# Altium PCB BRAKE PCB PROFILE (Left).PcbDoc
Units mm, origin at the board's own origin, x right, y up, seen from the top; angles counter-clockwise.
Board outline 198.6 x 90.6 mm, 2 copper layers (Top Layer, Bottom Layer); 79 components, 80 nets, 288 pads, 28 vias.
Unrouted connection lines stored in the file: 1.
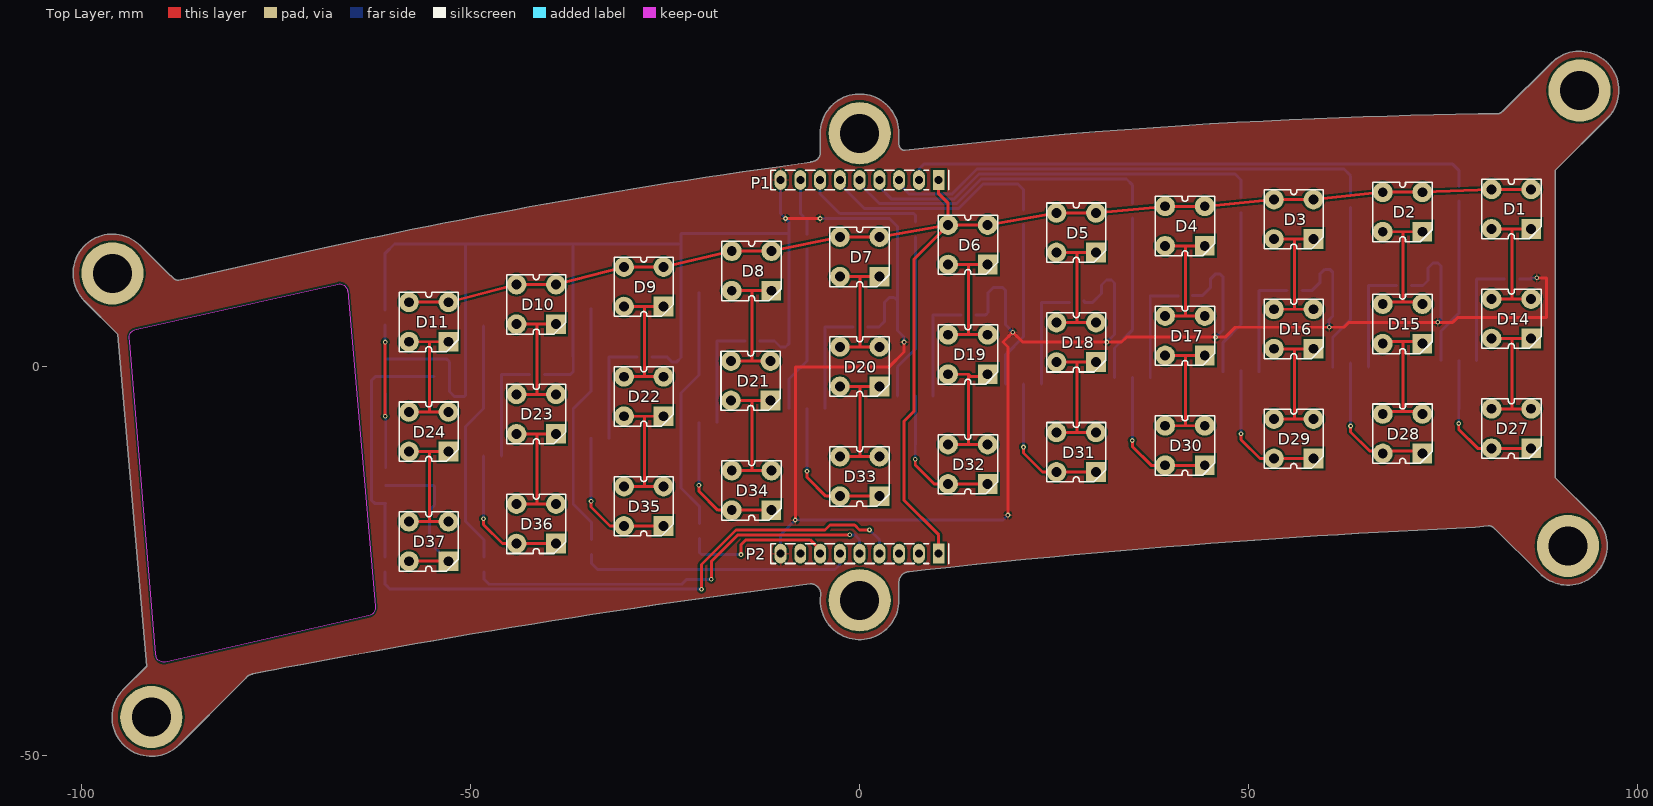
[diagram p0: Top Layer view]
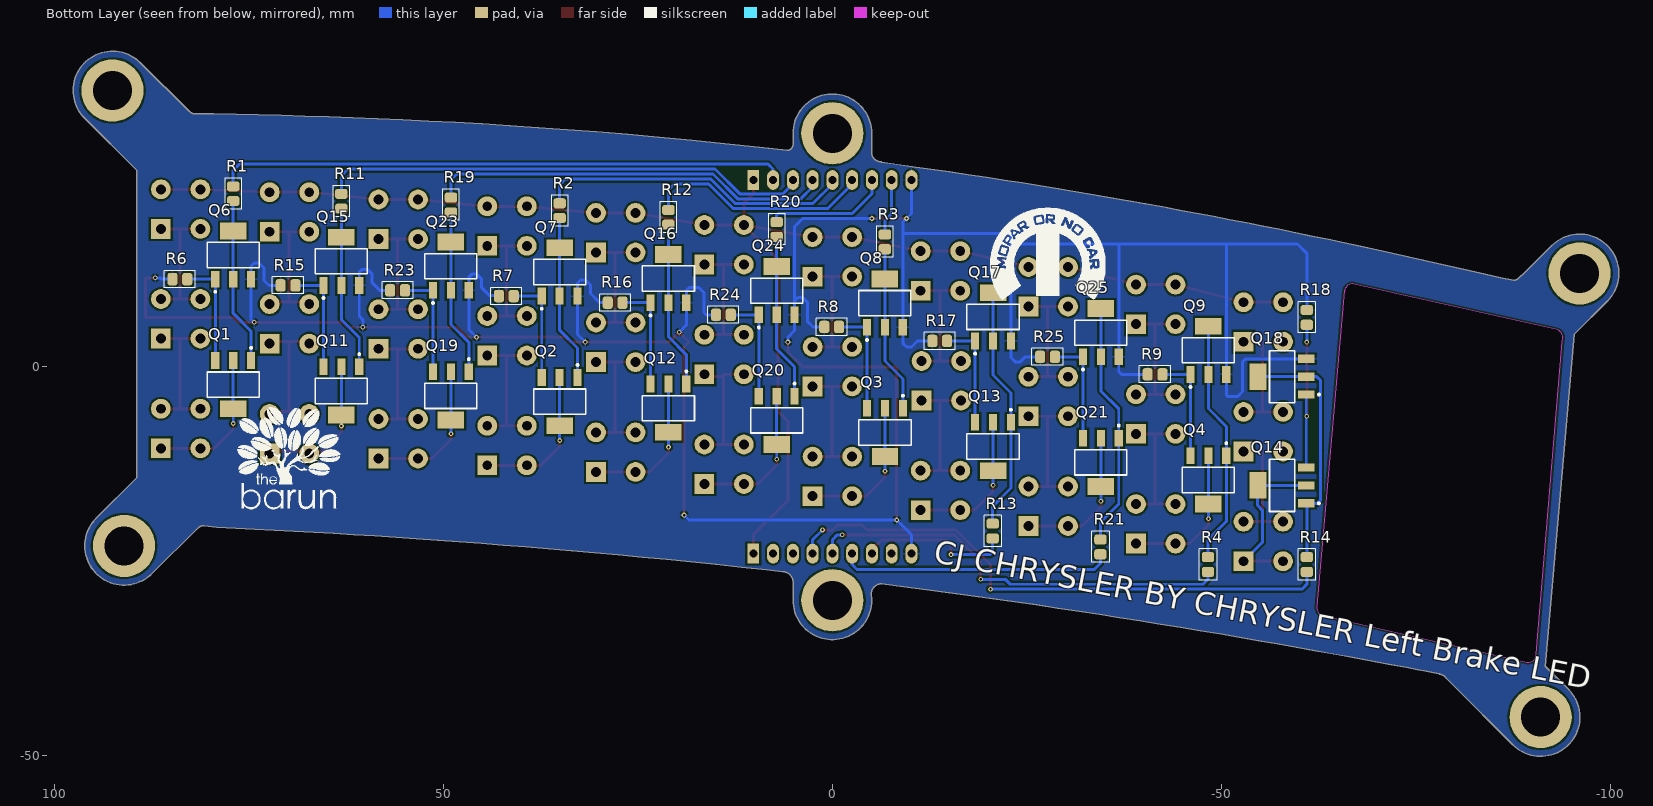
[diagram p1: Bottom Layer view, seen from below]
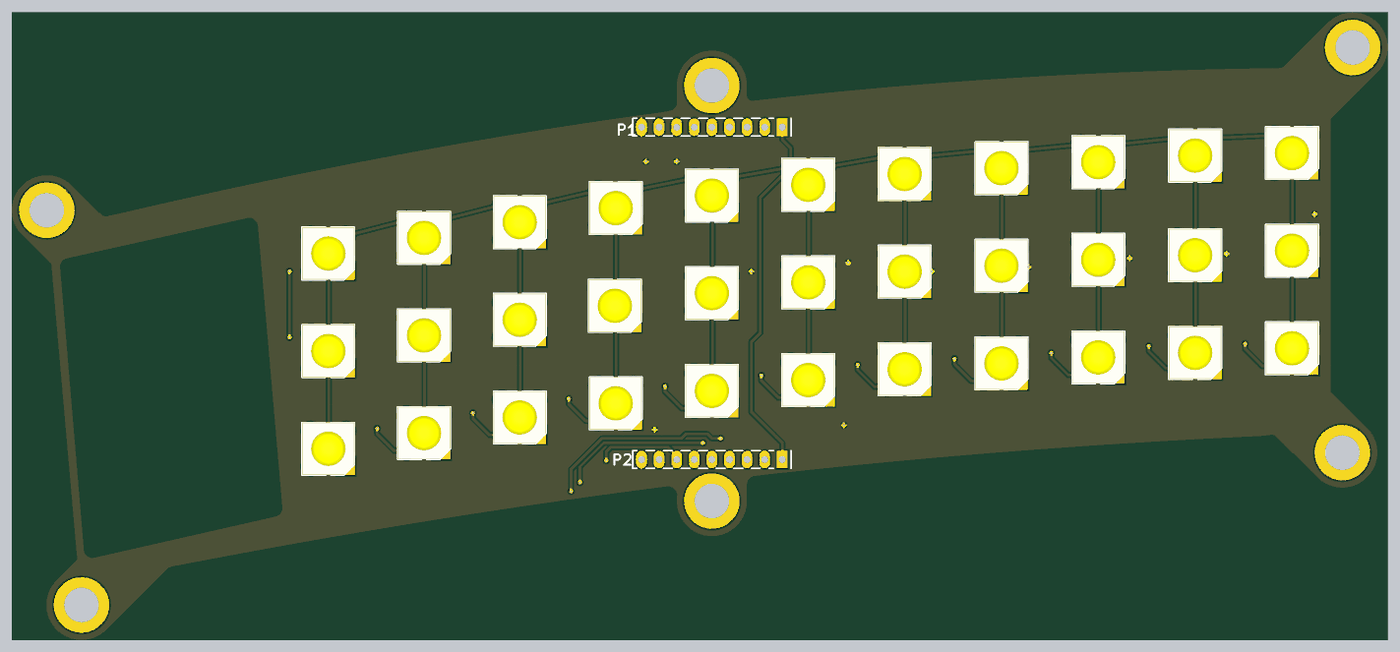
[diagram p2: 3D render of the assembled board from above, using the file's embedded part models]
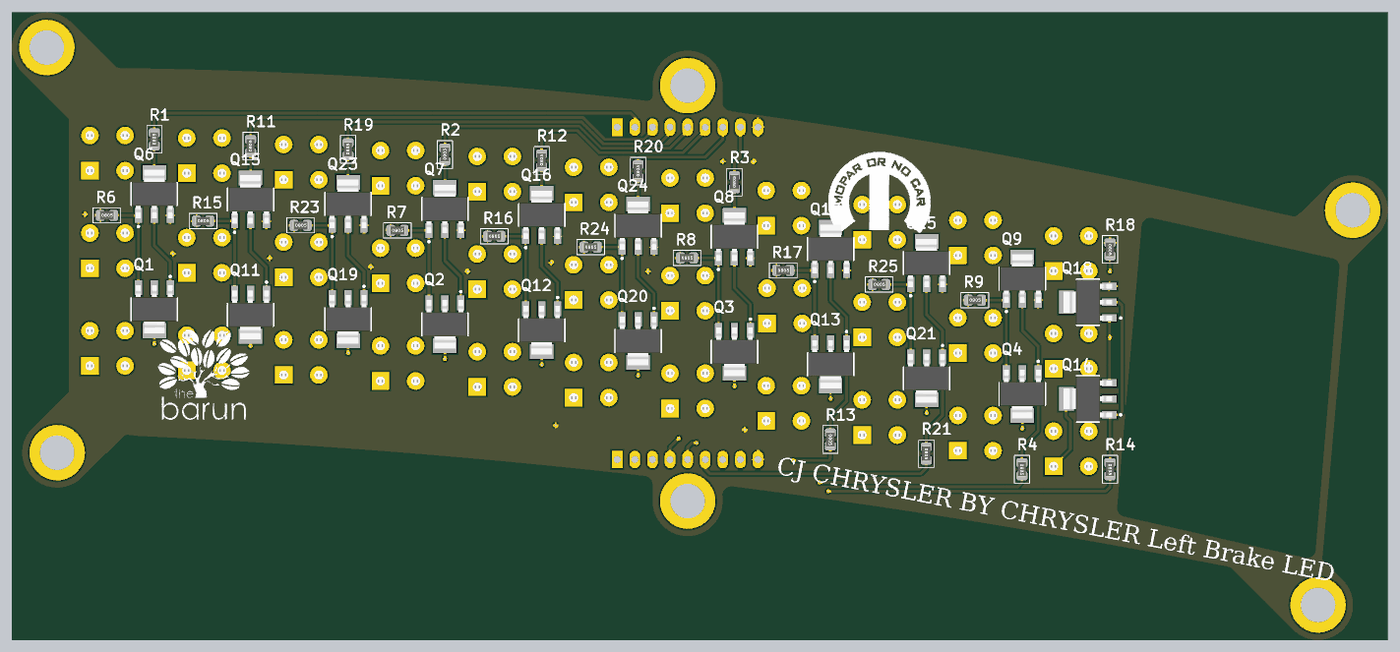
[diagram p3: 3D render of the assembled board from below, using the file's embedded part models]

## Layer stack, top to bottom
Top Solder: solder mask 0.0102, Solder Resist, Dk 3.5
Top Layer: signal copper 0.0356
Dielectric 1: dielectric 0.32, FR-4, Dk 4.8
Bottom Layer: signal copper 0.0356
Bottom Solder: solder mask 0.0102, Solder Resist, Dk 3.5

## Board outline
421 vertices, not listed, extent -101.049,-50.049 97.55,40.549
cut-out: -93.795,3.307 -93.823,3.646 cw(c-92.837,3.81) -92.961,4.802 -92.601,4.907 -67.045,10.622 cw(c-66.802,9.652) -65.81,9.776 -65.786,9.778 -62.265,-30.792 cw(c-63.246,-30.988) -62.895,-31.924 -63.388,-32.065 -89.229,-37.941 cw(c-89.408,-36.957) -90.408,-36.957

## Design rules (kind name [scope] priority, off if disabled: settings)
Clearance [All] p1: gap=0.254
PolygonConnect [All] p1: connectstyle=Relief reliefconductorwidth=0.254 reliefentries=4 polygonreliefangle="90 Angle" airgapwidth=0.254
RoomDefinition Indicator [InComponentClass('Indicator')] p1: confinementstyle=ConfineIn formatcopy=TRUE lockcomponents=FALSE outline -100,-50 100,-50 100,40 -100,40
RoutingVias [All] p1: holewidth=0.711 width=1.27 viastyle="Through Hole" minholewidth=0.305 minwidth=0.61 maxholewidth=0.711 maxwidth=1.27
SolderMaskExpansion [All] p1: expansion=0.102
Width [All] p1: maxlimit=2.54 minlimit=0.254 preferedwidth=0.254
30 further rules are at their usual default settings.

## Components (designator, comment, footprint, x,y, rotation, side; value= is the part's Value field where it differs from the comment)
D1 "AMBER" "CREE P4 YELLOW"#1 83.743,20.262 r180 top
D2 "AMBER" "CREE P4 YELLOW"#1 69.758,19.893 r180 top
D3 "AMBER" "CREE P4 YELLOW"#1 55.774,18.951 r180 top
D4 "AMBER" "CREE P4 YELLOW"#1 41.8,18.083 r180 top
D5 "AMBER" "CREE P4 YELLOW"#1 27.826,17.235 r180 top
D6 "AMBER" "CREE P4 YELLOW"#1 13.913,15.677 r180 top
D7 "AMBER" "CREE P4 YELLOW"#1 0,14.119 r180 top
D8 "AMBER" "CREE P4 YELLOW"#1 -13.884,12.318 r180 top
D9 "AMBER" "CREE P4 YELLOW"#1 -27.734,10.28 r180 top
D10 "AMBER" "CREE P4 YELLOW"#1 -41.551,8.019 r180 top
D11 "AMBER" "CREE P4 YELLOW"#1 -55.367,5.759 r180 top
D14 "AMBER" "CREE P4 YELLOW"#1 83.743,6.168 r180 top
D15 "AMBER" "CREE P4 YELLOW"#1 69.758,5.512 r180 top
D16 "AMBER" "CREE P4 YELLOW"#1 55.774,4.857 r180 top
D17 "AMBER" "CREE P4 YELLOW"#1 41.8,3.989 r180 top
D18 "AMBER" "CREE P4 YELLOW"#1 27.826,3.141 r180 top
D19 "AMBER" "CREE P4 YELLOW"#1 13.913,1.583 r180 top
D20 "AMBER" "CREE P4 YELLOW"#1 0,0.025 r180 top
D21 "AMBER" "CREE P4 YELLOW"#1 -14,-1.794 r180 top
D22 "AMBER" "CREE P4 YELLOW"#1 -27.734,-3.814 r180 top
D23 "AMBER" "CREE P4 YELLOW"#1 -41.551,-6.075 r180 top
D24 "AMBER" "CREE P4 YELLOW"#1 -55.367,-8.336 r180 top
D27 "AMBER" "CREE P4 YELLOW"#1 83.743,-7.936 r180 top
D28 "AMBER" "CREE P4 YELLOW"#1 69.758,-8.591 r180 top
D29 "AMBER" "CREE P4 YELLOW"#1 55.774,-9.247 r180 top
D30 "AMBER" "CREE P4 YELLOW"#1 41.8,-10.114 r180 top
D31 "AMBER" "CREE P4 YELLOW"#1 27.826,-10.963 r180 top
D32 "AMBER" "CREE P4 YELLOW"#1 13.913,-12.521 r180 top
D33 "AMBER" "CREE P4 YELLOW"#1 0,-14.078 r180 top
D34 "AMBER" "CREE P4 YELLOW"#1 -13.884,-15.88 r180 top
D35 "AMBER" "CREE P4 YELLOW"#2 -27.734,-20.458 r180 top
D36 "AMBER" "CREE P4 YELLOW"#1 -41.551,-20.178 r180 top
D37 "AMBER" "CREE P4 YELLOW"#1 -55.367,-22.439 r180 top
P1 "Header 9" "HEADER 1x9" 0,24 r180 top
P2 "Header 9" "HEADER 1x9" 0,-24 r180 top
Q1 "BCP56" SOT223 76.984,-2.296 r0 bottom
Q2 "BCP56" SOT223 35.042,-4.474 r0 bottom
Q3 "BCP56" SOT223 -6.759,-8.438 r0 bottom
Q4 "BCP56" SOT223 -48.31,-14.538 r0 bottom
Q6 "BCP56" SOT223 76.984,14.363 r180 bottom
Q7 "BCP56" SOT223 35.041,12.185 r180 bottom
Q8 "BCP56" SOT223 -6.745,8.18 r180 bottom
Q9 "BCP56" SOT223 -48.31,2.12 r180 bottom
Q11 "BCP56" SOT223 63.091,-3.1 r0 bottom
Q12 "BCP56" SOT223 21.067,-5.323 r0 bottom
Q13 "BCP56" SOT223 -20.642,-10.24 r0 bottom
Q14 "BCP56" SOT223 -57.785,-15.24 r90 bottom
Q15 "BCP56" SOT223 63.091,13.559 r180 bottom
Q16 "BCP56" SOT223 21.067,11.336 r180 bottom
Q17 "BCP56" SOT223 -20.643,6.419 r180 bottom
Q18 "BCP56" SOT223 -57.785,-1.27 r90 bottom
Q19 "BCP56" SOT223 49.015,-3.735 r0 bottom
Q20 "BCP56" SOT223 7.154,-6.881 r0 bottom
Q21 "BCP56" SOT223 -34.493,-12.278 r0 bottom
Q23 "BCP56" SOT223 49.015,12.924 r180 bottom
Q24 "BCP56" SOT223 7.154,9.778 r180 bottom
Q25 "BCP56" SOT223 -34.493,4.381 r180 bottom
R1 "1k" "RESISTOR 0805" 76.984,22.237 r90 bottom
R2 "1k" "RESISTOR 0805" 35.041,20.059 r90 bottom
R3 "1k" "RESISTOR 0805" -6.745,16.054 r90 bottom
R4 "1k" "RESISTOR 0805" -48.26,-25.4 r270 bottom
R6 "8R2" "RESISTOR 0805" 83.834,11.263 r180 bottom
R7 "8R2" "RESISTOR 0805" 41.892,9.085 r180 bottom
R8 "8R2" "RESISTOR 0805" 0.091,5.121 r180 bottom
R9 "8R2" "RESISTOR 0805" -41.459,-0.98 r180 bottom
R11 "1k" "RESISTOR 0805" 63.091,21.27 r90 bottom
R12 "1k" "RESISTOR 0805" 21.067,19.21 r90 bottom
R13 "1k" "RESISTOR 0805" -20.593,-21.102 r270 bottom
R14 "1k" "RESISTOR 0805" -60.96,-25.4 r270 bottom
R15 "8R2" "RESISTOR 0805" 69.941,10.459 r180 bottom
R16 "8R2" "RESISTOR 0805" 27.918,8.236 r180 bottom
R17 "8R2" "RESISTOR 0805" -13.792,3.319 r180 bottom
R18 "8R2" "RESISTOR 0805" -60.96,6.35 r270 bottom
R19 "1k" "RESISTOR 0805" 49.015,20.798 r90 bottom
R20 "1k" "RESISTOR 0805" 7.154,17.652 r90 bottom
R21 "1k" "RESISTOR 0805" -34.444,-23.139 r270 bottom
R23 "8R2" "RESISTOR 0805" 55.865,9.824 r180 bottom
R24 "8R2" "RESISTOR 0805" 14.005,6.678 r180 bottom
R25 "8R2" "RESISTOR 0805" -27.643,1.281 r180 bottom

## Footprints (in the part's own frame and the unit in brackets; to place one, negate y for a bottom-side part, rotate by r counter-clockwise, add the part's x,y. Pads: shape width x height; smd on the part's side, far side on the other; paste and mask are expansions set on the pad)
"CREE P4 YELLOW"#1 [mm] "CREE P4 YELLOW"
  rect 2.54x2.54 hole 1.27: 1(-2.54,2.54)
  round 2.54 hole 1.27: 2(-2.54,-2.54) 3(2.54,-2.54) 4(2.54,2.54)
  silkscreen extent -3.81,-3.81 3.81,3.81, body extent -3.81,-3.81 3.81,3.81, height 6.91
"CREE P4 YELLOW"#2 [mm] "CREE P4 YELLOW"
  rect 2.54x2.54 hole 1.27: 1(-2.54,0)
  round 2.54 hole 1.27: 2(-2.54,-5.08) 3(2.54,-5.08) 4(2.54,0)
  silkscreen extent -3.81,-6.35 3.81,1.27, body extent -3.81,-6.35 3.81,1.27, height 6.91
"HEADER 1x9" [mil]
  rect 60x100 hole 40: 1(-400,0)
  oval 60x100 hole 40: 2(-300,0) 3(-200,0) 4(-100,0) 5(0,0) 6(100,0) 7(200,0) 8(300,0) 9(400,0)
  silkscreen extent -450,-50 450,50
"RESISTOR 0805" [mm]
  rrect50% 1.3x1.6 smd: 1(-0.95,0) 2(0.95,0)
  silkscreen extent -2,-1.1 2,1.1, body extent -1.25,-0.62 1.25,0.62, height 0.8
SOT223 [mm] "SOT-223/SC-73; 4 Leads; Body 6.7 x 7.3 mm, inc. leads (LxW max)"
  rect 1.05x2.15 smd: 1(-2.3,-3.1) 2(0,-3.1) 3(2.3,-3.1)
  rect 3.4x2.15 smd: 2(0,3.1)
  silkscreen extent -3.35,-4.85 3.35,1.62, body extent -3.25,-3.5 3.25,3.5, height 1.67

## Part data
D1 D2 D3 D4 D5 D6 D7 D8 D9 D10 D11 D14 D15 D16 D17 D18 D19 D20 D21 D22 D23 D24 D27 D28 D29 D30 D31 D32 D33 D34 D35 D36 D37: library part CP41B-AFSCM0Q0264, "CREE AMBER LED P4 (SUPERFLUX)"
P1 P2: "Header, 9-Pin"
Q1 Q2 Q3 Q4 Q6 Q7 Q8 Q9 Q11 Q12 Q13 Q14 Q15 Q16 Q17 Q18 Q19 Q20 Q21 Q23 Q24 Q25: library part NPN, "BCP56 80 V, 1 A NPN medium power transistors"
R1 R2 R3 R4 R6 R7 R8 R9 R11 R12 R13 R14 R15 R16 R17 R18 R19 R20 R21 R23 R24 R25: library part Res2, "Resistor"

## Free pads (board coordinates)
  round 8 hole 5 unplated: MOUNT(-96,12) MOUNT(-91,-45) MOUNT(0,-30) MOUNT(0,30) MOUNT(91.008,-23.011) MOUNT(92.5,35.5)

## Via types
v1: diameter 0.61, hole 0.305, Top Layer to Bottom Layer, 28 vias

## Nets (pads, with @x,y where several pads share a name; then routed paths per layer and width w, separated by ;. In a path a pad name is that pad's centre, name@x,y a point inside that pad or via, vN(x,y) a via of type N, cw(c..) or ccw(c..) an arc to the next point about the centre after c; other vN are vias at no path point)
DRIVE_0: P1.2 R1.2 | length 73.4
  Bottom Layer w0.381: P1.2 7.62,25.4 8.255,26.035 76.2,26.035 76.984,25.251 R1.2
DRIVE_1: P1.3 R11.2 | length 63
  Bottom Layer w0.381: P1.3 5.08,23.495 6.35,22.225 11.911,22.225 15.086,25.4 62.23,25.4 63.091,24.539 R11.2
DRIVE_2: P1.4 R19.2 | length 51.9
  Bottom Layer w0.381: P1.4 2.54,23.113 4.063,21.59 12.174,21.59 15.349,24.765 48.26,24.765 49.015,24.01 R19.2
DRIVE_3: P1.5 R2.2 | length 40.6
  Bottom Layer w0.381: P1.5 0,23.495 2.54,20.955 12.437,20.955 15.612,24.13 34.29,24.13 35.041,23.379 R2.2
DRIVE_4: P1.6 R12.2 | length 29.6
  Bottom Layer w0.381: P1.6 -2.54,23.495 0.635,20.32 12.7,20.32 15.875,23.495 20.32,23.495 21.067,22.748 R12.2
DRIVE_5: P1.7 R20.2 | length 16
  Bottom Layer w0.381: P1.7 -5.08,22.225 -2.54,19.685 6.985,19.685 7.154,19.516 R20.2
DRIVE_6: P1.8 R3.2 | length 7.4
  Bottom Layer w0.381: P1.8 -7.62,19.685 -6.745,18.81 R3.2
DRIVE_7: P2.7 R13.2 | length 20
  Top Layer w0.381: v1(-15.24,-24.13) -15.24,-22.86 -14.605,-22.225 -6.35,-22.225 -5.08,-23.495 P2.7
  Bottom Layer w0.381: R13.2 -20.593,-23.857 -20.32,-24.13 v1(-15.24,-24.13)
DRIVE_8: P2.6 R21.2 | length 35.1
  Bottom Layer w0.381: R21.2 -34.444,-25.246 -33.655,-26.035 -3.175,-26.035 -2.54,-25.4 P2.6
DRIVE_9: P2.5 pad.MOUNT@0,-30 R4.2 | length 55.5
  Top Layer w0.381: v1(-19.05,-27.305) -19.05,-25.028 -15.612,-21.59 v1(-1.27,-21.59)
  Bottom Layer w0.381: R4.2 -48.26,-27.305 -47.625,-27.94 -22.86,-27.94 -22.225,-27.305 v1(-19.05,-27.305) ; v1(-1.27,-21.59) -0.635,-21.59 0,-22.225 P2.5
DRIVE_10: P2.4 R14.2 | length 73.2
  Top Layer w0.381: v1(-20.32,-28.575) -20.32,-25.4 -15.875,-20.955 -4.445,-20.955 -3.81,-20.32 -0.635,-20.32 0,-20.955 v1(1.27,-20.955)
  Bottom Layer w0.381: R14.2 -60.96,-27.94 -60.325,-28.575 v1(-20.32,-28.575) ; v1(1.27,-20.955) 2.54,-22.225 P2.4
DRIVE_11: P2.3
DRIVE_12: P2.2
GND: P1.9 P2.9 Q6.3 Q7.3 Q8.3 Q9.3 Q15.3 Q16.3 Q17.3 Q18.3 Q23.3 Q24.3 Q25.3 R6.1 R7.1 R8.1 R9.1 R15.1 R16.1 R17.1 R18.1 R23.1 R24.1 R25.1 | length 435.9
  Top Layer w0.381: v1(-9.525,19.05) v1(-5.08,19.05) ; v1(-8.255,-19.685) -8.255,0 3.81,0 5.715,1.905 v1(5.715,3.175) ; v1(19.05,-19.05) 19.05,2.54 18.415,3.175 v1(19.685,4.445) 20.955,3.175 v1(31.75,3.175) 33.655,3.175 34.29,3.81 v1(45.72,3.81) 46.99,3.81 48.26,5.08 v1(60.325,5.08) 62.23,5.08 62.865,5.715 v1(74.295,5.715) 76.2,5.715 76.835,6.35 88.265,6.35 88.265,11.43 v1(86.995,11.43)
  Bottom Layer w0.381: R18.1 -60.96,14.605 -59.773,15.792 -50.502,15.792 ; Q18.3 -53.1,1.03 -52.705,0.635 -52.705,-3.175 -52.07,-3.81 -50.8,-3.81 -50.61,-3.62 Q9.3 -50.61,15.685 -50.502,15.792 ; R9.1 -37.175,-0.98 -36.793,-0.598 Q25.3 -36.83,1.318 -36.83,15.792 ; R25.1 -24.776,1.281 -24.13,0.635 -23.495,0.635 -22.943,1.187 Q17.3 -22.943,15.792 ; R17.1 -10.939,3.319 -10.16,2.54 -9.525,2.54 -9.045,3.02 Q8.3 -9.045,17.145 ; P2.9 -10.16,-21.59 v1(-8.255,-19.685) 18.415,-19.685 v1(19.05,-19.05) ; P1.9 -10.16,19.685 v1(-9.525,19.05) -9.045,18.57 -9.045,17.145 ; v1(-5.08,19.05) 3.81,19.05 4.854,18.006 4.854,8.481 ; R8.1 2.499,5.121 3.175,5.796 3.175,8.255 3.81,8.89 4.445,8.89 4.854,8.481 ; v1(5.715,3.175) 5.715,3.81 4.854,4.671 Q24.3 4.854,8.481 ; R24.1 16.203,6.678 16.51,6.985 16.51,9.525 17.145,10.16 18.415,10.16 18.767,9.808 Q16.3 18.767,5.363 v1(19.685,4.445) ; R16.1@28.765,8.45 R16.1@28.868,8.45 ; R16.1 29.898,8.236 31.083,9.421 31.083,10.521 31.718,11.156 32.353,11.156 32.741,10.767 Q7.3 32.741,4.166 v1(31.75,3.175) ; R7.1@42.738,9.189 44.085,9.189 45.056,10.16 45.056,11.261 45.691,11.896 46.326,11.896 46.715,11.507 Q23.3 46.715,4.805 v1(45.72,3.81) ; R23.1 58.161,9.824 59.132,10.795 59.132,11.896 59.767,12.531 60.402,12.531 60.791,12.142 Q15.3 60.791,6.519 60.325,6.053 v1(60.325,5.08) ; R15.1 72.39,10.459 73.025,11.094 73.025,12.7 73.66,13.335 74.295,13.335 74.684,12.946 Q6.3 74.684,6.104 v1(74.295,5.715) ; R6.1 86.193,11.263 86.36,11.43 v1(86.995,11.43) ; -50.502,15.792 -36.83,15.792 ; -36.83,15.792 -22.943,15.792 ; -22.943,15.792 -22.943,17.062 -22.86,17.145 -9.045,17.145
NetD1_1: D1.1 D1.4 D14.2 D14.3 | length 19.2
  Top Layer w0.381: D14.3 83.82,8.708 ; D1.4 83.82,17.722 ; D14.2 83.82,8.708 ; D1.1 83.82,17.722 ; 83.82,8.708 83.82,17.722
NetD2_1: D2.1 D2.4 D15.2 D15.3 | length 19.2
  Top Layer w0.381: D15.3@67.218,8.339 69.835,8.339 ; D2.4 69.835,17.353 ; D15.2@72.298,8.339 69.835,8.339 ; D2.1 69.835,17.353 ; 69.835,8.339 69.835,17.353
NetD3_1: D3.1 D3.4 D16.2 D16.3 | length 19.2
  Top Layer w0.381: D16.3 55.851,7.397 ; D3.4 55.851,16.411 ; D16.2 55.851,7.397 ; D3.1 55.851,16.411 ; 55.851,7.397 55.851,16.411
NetD4_1: D4.1 D4.4 D17.2 D17.3 | length 19.2
  Top Layer w0.381: D17.3 41.878,6.529 ; D4.4 41.878,15.543 ; D17.2 41.878,6.529 ; D4.1 41.878,15.543 ; 41.878,6.529 41.878,15.543
NetD5_1: D5.1 D5.4 D18.2 D18.3 | length 19.2
  Top Layer w0.381: D18.3 27.903,5.681 ; D5.4 27.903,14.695 ; D18.2 27.903,5.681 ; D5.1 27.903,14.695 ; 27.903,5.681 27.903,14.695
NetD6_1: D6.1 D6.4 D19.2 D19.3 | length 19.2
  Top Layer w0.381: D19.3 13.99,4.123 ; D6.4 13.99,13.137 ; D19.2 13.99,4.123 ; D6.1 13.99,13.137 ; 13.99,4.123 13.99,13.137
NetD7_1: D7.1 D7.4 D20.2 D20.3 | length 19.2
  Top Layer w0.381: D20.3 0.077,2.565 ; D7.4 0.077,11.579 ; D20.2 0.077,2.565 ; D7.1 0.077,11.579 ; 0.077,2.565 0.077,11.579
NetD8_1: D8.1 D8.4 D21.2 D21.3 | length 19.2
  Top Layer w0.381: D21.3@-16.424,0.764 -13.806,0.764 ; D8.4 -13.806,9.778 ; D21.2@-11.344,0.764 -13.806,0.764 ; D8.1 -13.806,9.778 ; -13.806,0.764 -13.806,9.778
NetD9_1: D9.1 D9.4 D22.2 D22.3 | length 19.2
  Top Layer w0.381: D22.3 -27.657,-1.274 ; D9.4 -27.657,7.74 ; D22.2 -27.657,-1.274 ; D9.1 -27.657,7.74 ; -27.657,-1.274 -27.657,7.74
NetD10_1: D10.1 D10.4 D23.2 D23.3 | length 19.2
  Top Layer w0.381: D23.3 -41.474,-3.535 ; D10.4 -41.474,5.479 ; D23.2 -41.474,-3.535 ; D10.1 -41.474,5.479 ; -41.474,-3.535 -41.474,5.479
NetD11_1: D11.1 D11.4 D24.2 D24.3 | length 19.2
  Top Layer w0.381: D24.3 -55.29,-5.796 ; D11.4 -55.29,3.219 ; D24.2 -55.29,-5.796 ; D11.1 -55.29,3.219 ; -55.29,-5.796 -55.29,3.219
NetD12_1: 
NetD13_1: 
NetD14_1: D14.1 D14.4 D27.2 D27.3 | length 19.2
  Top Layer w0.381: D27.3 83.82,-5.396 ; D14.4 83.82,3.628 ; D27.2 83.82,-5.396 ; D14.1 83.82,3.628 ; 83.82,-5.396 83.82,3.628
NetD15_1: D15.1 D15.4 D28.2 D28.3 | length 19.2
  Top Layer w0.381: D28.3@67.218,-5.765 69.835,-5.765 ; D15.4@67.218,3.259 69.835,3.259 ; D28.2@72.298,-5.765 69.835,-5.765 ; D15.1@72.298,3.259 69.835,3.259 ; 69.835,-5.765 69.835,3.259
NetD16_1: D16.1 D16.4 D29.2 D29.3 | length 19.2
  Top Layer w0.381: D29.3 55.851,-6.707 ; D16.4 55.851,2.317 ; D29.2 55.851,-6.707 ; D16.1 55.851,2.317 ; 55.851,-6.707 55.851,2.317
NetD17_1: D17.1 D17.4 D30.2 D30.3 | length 19.2
  Top Layer w0.381: D30.3 41.878,-7.574 ; D17.4 41.878,1.449 ; D30.2 41.878,-7.574 ; D17.1 41.878,1.449 ; 41.878,-7.574 41.878,1.449
NetD18_1: D18.1 D18.4 D31.2 D31.3 | length 19.2
  Top Layer w0.381: D31.3 27.903,-8.423 ; D18.4 27.903,0.601 ; D31.2 27.903,-8.423 ; D18.1 27.903,0.601 ; 27.903,-8.423 27.903,0.601
NetD19_1: D19.1 D19.4 D32.2 D32.3 | length 19.4
  Top Layer w0.381: D32.3 13.99,-9.981 ; D19.4 13.99,-0.957 ; D32.2 13.99,-9.981 ; D19.1 16.14,-1.27 14.303,-1.27 13.99,-0.957 ; 13.99,-9.981 13.99,-0.957
NetD20_1: D20.1 D20.4 D33.2 D33.3 | length 19.2
  Top Layer w0.381: D33.3 0.077,-11.538 ; D20.4 0.077,-2.515 ; D33.2 0.077,-11.538 ; D20.1 0.077,-2.515 ; 0.077,-11.538 0.077,-2.515
NetD21_1: D21.1 D21.4 D34.2 D34.3 | length 19.2
  Top Layer w0.381: D34.3 -13.806,-13.34 ; D21.4@-16.424,-4.316 -13.806,-4.316 ; D34.2 -13.806,-13.34 ; D21.1@-11.344,-4.316 -13.806,-4.316 ; -13.806,-13.34 -13.806,-4.316
NetD22_1: D22.1 D22.4 D35.2 D35.3 | length 19.2
  Top Layer w0.381: D35.3 -27.657,-15.378 ; D22.4 -27.657,-6.354 ; D35.2 -27.657,-15.378 ; D22.1 -27.657,-6.354 ; -27.657,-15.378 -27.657,-6.354
NetD23_1: D23.1 D23.4 D36.2 D36.3 | length 19.2
  Top Layer w0.381: D36.3 -41.474,-17.638 ; D23.4 -41.474,-8.615 ; D36.2 -41.474,-17.638 ; D23.1 -41.474,-8.615 ; -41.474,-17.638 -41.474,-8.615
NetD24_1: D24.1 D24.4 D37.2 D37.3 | length 19.2
  Top Layer w0.381: D37.3 -55.29,-19.899 ; D24.4 -55.29,-10.876 ; D37.2 -55.29,-19.899 ; D24.1 -55.29,-10.876 ; -55.29,-19.899 -55.29,-10.876
NetD25_1: 
NetD26_1: 
NetQ1_1: Q1.1 Q6.2 R1.1 | length 21.4
  Bottom Layer w0.381: Q1.1 74.684,4.582 76.984,6.882 76.984,11.263 76.984,17.463 R1.1
NetQ1_3: Q1.3 Q6.1 R6.2 | length 14.1
  Bottom Layer w0.381: Q1.3 Q6.1 R6.2
NetQ2_1: Q2.1 Q7.2 R2.1 | length 21.4
  Bottom Layer w0.381: Q2.1 32.741,2.404 35.041,4.704 35.041,9.085 35.041,15.285 R2.1
NetQ2_3: Q2.3 Q7.1 R7.2 | length 14.1
  Bottom Layer w0.381: Q2.3 Q7.1 R7.2
NetQ3_1: Q3.1 Q8.2 R3.1 | length 21.4
  Bottom Layer w0.381: Q3.1 -9.059,-1.56 -6.759,0.74 Q8.2@-6.759,5.121 ; Q8.2@-6.745,5.08 -6.745,11.28 R3.1
NetQ3_3: Q3.3 Q8.1 R8.2 | length 14.1
  Bottom Layer w0.381: Q3.3 -4.459,5.121 R8.2
NetQ4_1: Q4.1 Q9.2 R4.1 | length 31.6
  Bottom Layer w0.381: Q9.2@-48.31,5.22 -48.31,-0.98 -48.31,-5.361 -50.61,-7.661 Q4.1 -50.61,-19.875 -48.26,-22.225 R4.1
NetQ4_3: Q4.3 Q9.1 R9.2 | length 14.1
  Bottom Layer w0.381: Q4.3 Q9.1 R9.2
NetQ5_1: 
NetQ5_3: 
NetQ11_1: Q11.1 Q15.2 R11.1 | length 21.4
  Bottom Layer w0.381: Q11.1 60.791,3.778 63.091,6.078 63.091,10.459 63.091,16.659 R11.1 R11.1@63.091,20.483
NetQ11_3: Q11.3 Q15.1 R15.2 | length 14.1
  Bottom Layer w0.381: Q11.3 Q15.1 R15.2
NetQ12_1: Q12.1 Q16.2 R12.1 | length 21.4
  Bottom Layer w0.381: Q12.1 18.767,1.555 21.067,3.855 21.067,8.236 21.067,14.436 R12.1
NetQ12_3: Q12.3 Q16.1 R16.2 | length 14.1
  Bottom Layer w0.381: Q12.3 Q16.1 R16.2
NetQ13_1: Q13.1 Q17.2 R13.1 | length 31.6
  Bottom Layer w0.381: Q17.2@-20.643,9.519 -20.643,3.319 -20.643,-1.062 -22.943,-3.362 Q13.1 -22.943,-15.577 -20.593,-17.927 R13.1
NetQ13_3: Q13.3 Q17.1 R17.2 | length 14.1
  Bottom Layer w0.381: Q13.3 Q17.1 R17.2
NetQ14_1: Q14.1 Q18.2 R14.1 | length 32.5
  Bottom Layer w0.381: R14.1 -60.96,-17.615 Q14.1 -62.306,-17.54 -62.701,-17.145 -62.701,-1.741 -62.23,-1.27 -60.885,-1.27 Q18.2@-54.685,-1.27
NetQ14_3: Q14.3 Q18.1 R18.2 | length 21.1
  Top Layer w0.381: v1(-60.96,-6.35) v1(-60.96,3.175)
  Bottom Layer w0.381: v1(-60.96,3.175) R18.2 ; Q14.3 Q18.1
NetQ19_1: Q19.1 Q23.2 R19.1 | length 21.4
  Bottom Layer w0.381: Q19.1 46.715,3.143 49.015,5.443 49.015,9.824 49.015,16.024 R19.1
NetQ19_3: Q19.3 Q23.1 R23.2 | length 14.1
  Bottom Layer w0.381: Q19.3 Q23.1 R23.2
NetQ20_1: Q20.1 Q24.2 R20.1 | length 21.4
  Bottom Layer w0.381: Q20.1 4.854,-0.003 7.154,2.297 7.154,6.678 7.154,12.878 R20.1
NetQ20_3: Q20.3 Q24.1 R24.2 | length 14.1
  Bottom Layer w0.381: Q20.3 Q24.1 R24.2
NetQ21_1: Q21.1 Q25.2 R21.1 | length 31.6
  Bottom Layer w0.381: Q25.2@-34.493,7.481 -34.493,1.281 -34.493,-3.1 -36.793,-5.4 Q21.1 -36.793,-17.615 -34.444,-19.964 R21.1
NetQ21_3: Q21.3 Q25.1 R25.2 | length 14.1
  Bottom Layer w0.381: Q21.3 Q25.1 R25.2
NetQ22_1: 
NetQ22_3: 
SINK_0: D27.1 D27.4 Q1.2 | length 19.2
  Top Layer w0.381: v1(76.976,-7.285) 76.976,-8.047 79.405,-10.476 D27.1
  Bottom Layer w0.381: v1(76.976,-7.285) 76.976,-5.403 76.984,-5.396 Q1.2@76.984,0.804
SINK_1: D28.1 D28.4 Q11.2 | length 19.2
  Top Layer w0.381: v1(63.084,-7.604) 63.084,-8.366 65.512,-10.795 D28.1@72.39,-10.795
  Bottom Layer w0.381: v1(63.084,-7.604) 63.084,-5.723 63.091,-5.715 Q11.2@63.091,0.485
SINK_2: D29.1 D29.4 Q19.2 | length 19.2
  Top Layer w0.381: v1(49.007,-8.596) 49.007,-9.358 51.436,-11.787 D29.1
  Bottom Layer w0.381: v1(49.007,-8.596) 49.007,-6.715 49.015,-6.707 Q19.2@49.015,-0.507
SINK_3: D30.1 D30.4 Q2.2 | length 19.2
  Top Layer w0.381: v1(35.034,-9.463) 35.034,-10.225 37.463,-12.654 D30.1
  Bottom Layer w0.381: v1(35.034,-9.463) 35.034,-7.582 35.042,-7.574 Q2.2@35.042,-1.374
SINK_4: D31.1 D31.4 Q12.2 | length 19.2
  Top Layer w0.381: v1(21.06,-10.312) 21.06,-11.074 23.489,-13.503 D31.1
  Bottom Layer w0.381: v1(21.06,-10.312) 21.06,-8.431 21.067,-8.423 Q12.2@21.067,-2.223
SINK_5: D32.1 D32.4 Q20.2 | length 19.2
  Top Layer w0.381: v1(7.147,-11.87) 7.147,-12.632 9.575,-15.061 D32.1
  Bottom Layer w0.381: v1(7.147,-11.87) 7.147,-9.988 7.154,-9.981 Q20.2@7.154,-3.781
SINK_6: D33.1 D33.4 Q3.2 | length 19.2
  Top Layer w0.381: v1(-6.766,-13.428) -6.766,-14.19 -4.338,-16.618 D33.1
  Bottom Layer w0.381: v1(-6.766,-13.428) -6.766,-11.546 -6.759,-11.538 Q3.2@-6.759,-5.338
SINK_7: D34.1 D34.4 Q13.2 | length 19.2
  Top Layer w0.381: v1(-20.65,-15.229) -20.65,-15.991 -18.221,-18.42 D34.1
  Bottom Layer w0.381: v1(-20.65,-15.229) -20.65,-13.348 -20.642,-13.34 Q13.2@-20.642,-7.14
SINK_8: D35.1 D35.4 Q21.2 | length 19.2
  Top Layer w0.381: v1(-34.501,-17.267) -34.501,-18.029 -32.072,-20.458 D35.1
  Bottom Layer w0.381: v1(-34.501,-17.267) -34.501,-15.385 -34.493,-15.378 Q21.2@-34.493,-9.178
SINK_9: D36.1 D36.4 Q4.2 | length 19.2
  Top Layer w0.381: v1(-48.317,-19.528) -48.317,-20.29 -45.888,-22.718 D36.1
  Bottom Layer w0.381: v1(-48.317,-19.528) -48.317,-17.646 -48.31,-17.638 Q4.2@-48.31,-11.438
SINK_10: D37.1 D37.4 Q14.2 | length 22.3
  Top Layer w0.381: D37.4 D37.1
  Bottom Layer w0.381: Q14.2@-60.885,-15.24 -54.685,-15.24 -54.61,-15.315 -54.61,-17.78 -55.245,-18.415 -55.245,-22.561 D37.1
SINK_11: 
SINK_12: 
V+: D1.2 D1.3 D2.2 D2.3 D3.2 D3.3 D4.2 D4.3 D5.2 D5.3 D6.2 D6.3 D7.2 D7.3 D8.2 D8.3 D9.2 D9.3 D10.2 D10.3 D11.2 D11.3 P1.1 P2.1 | length 198.3
  Top Layer w0.381: D11.3 D11.2 D10.3 D10.2 D9.3 D9.2 D8.3 D8.2 D7.3 D7.2 D6.3 ; P2.1 10.16,-21.59 5.715,-17.145 5.715,-6.985 6.985,-5.715 6.985,13.829 D6.3 ; P1.1 10.16,22.225 11.373,21.012 D6.3 ; D1.2 D1.3 D2.2 D2.3 D3.2 D3.3 D4.2 D4.3 D5.2 D5.3 D6.2 D6.3
pads on no net: P2.8

## Polygon pours and split planes (outlines as drawn)
GND on Top Layer "TOP GND" (solid, remove dead copper, pour order 0): 421 vertices, not listed, extent -101.049,-50.049 97.55,40.549
GND on Bottom Layer "BOTTOM GND" (solid, remove dead copper, pour order 1): 421 vertices, not listed, extent -101.049,-50.049 97.55,40.549

## Silkscreen, mask and mechanical layers (free items; w line width, h text height)
Bottom Overlay:
  drawing of 48 lines, arcs and shapes, not listed
  text "CJ CHRYSLER BY CHRYSLER Left Brake LED" at -12.7,-26.035 h5 r11
Mechanical 1:
  drawing of 162 lines, arcs and shapes, not listed
Mechanical 2:
  drawing of 1279 lines, arcs and shapes, not listed